# Altium PCB Earphone-4.PcbDoc
Units mm, origin at the board's own origin, x right, y up, seen from the top; angles counter-clockwise.
Board outline 20.1 x 47.1 mm, 2 copper layers (Top Layer, Bottom Layer); 36 components, 27 nets, 152 pads, 27 vias.
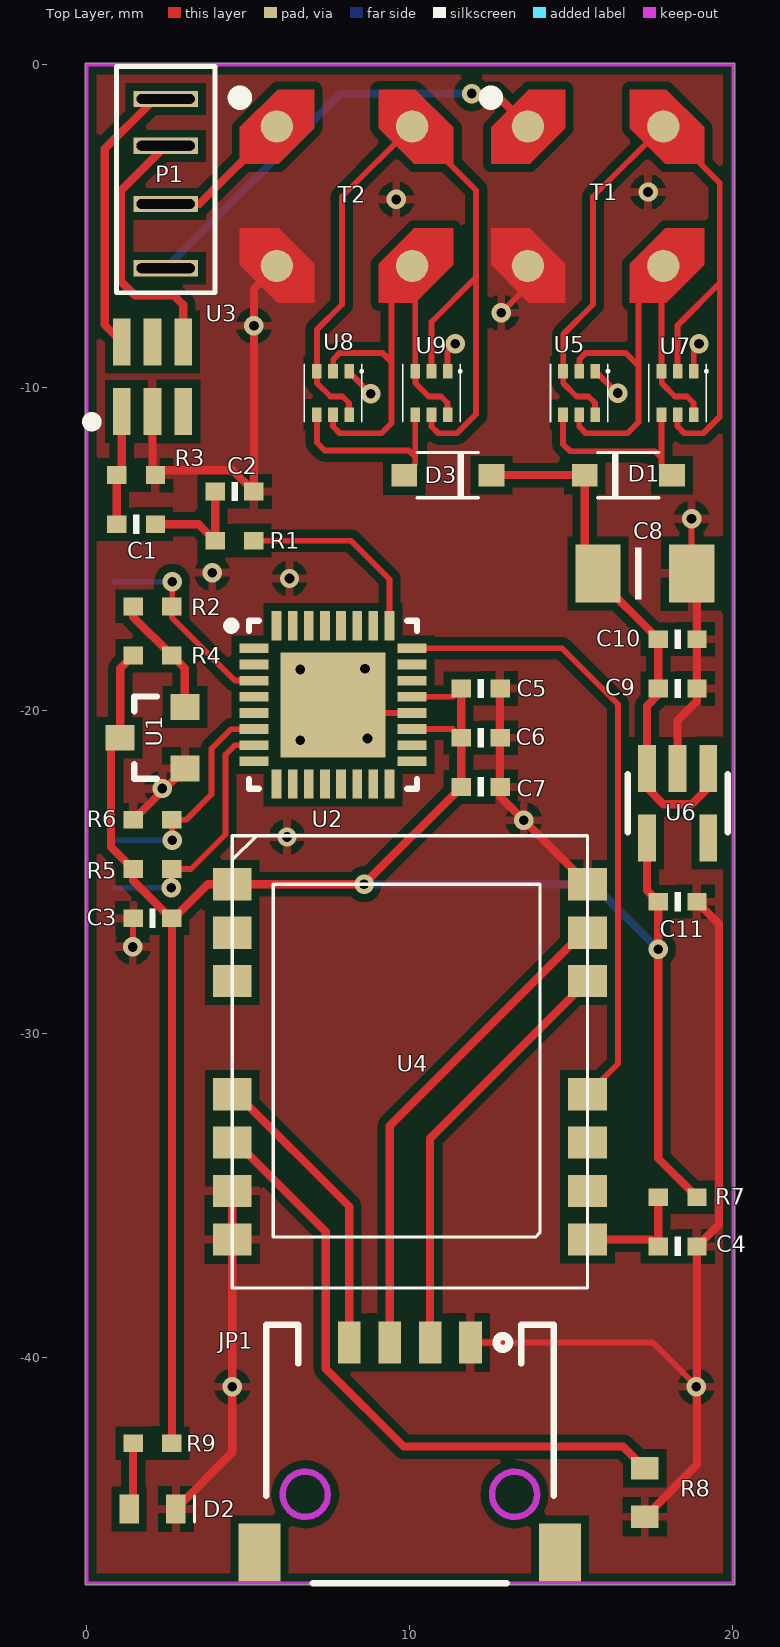
[diagram p0: Top Layer view]
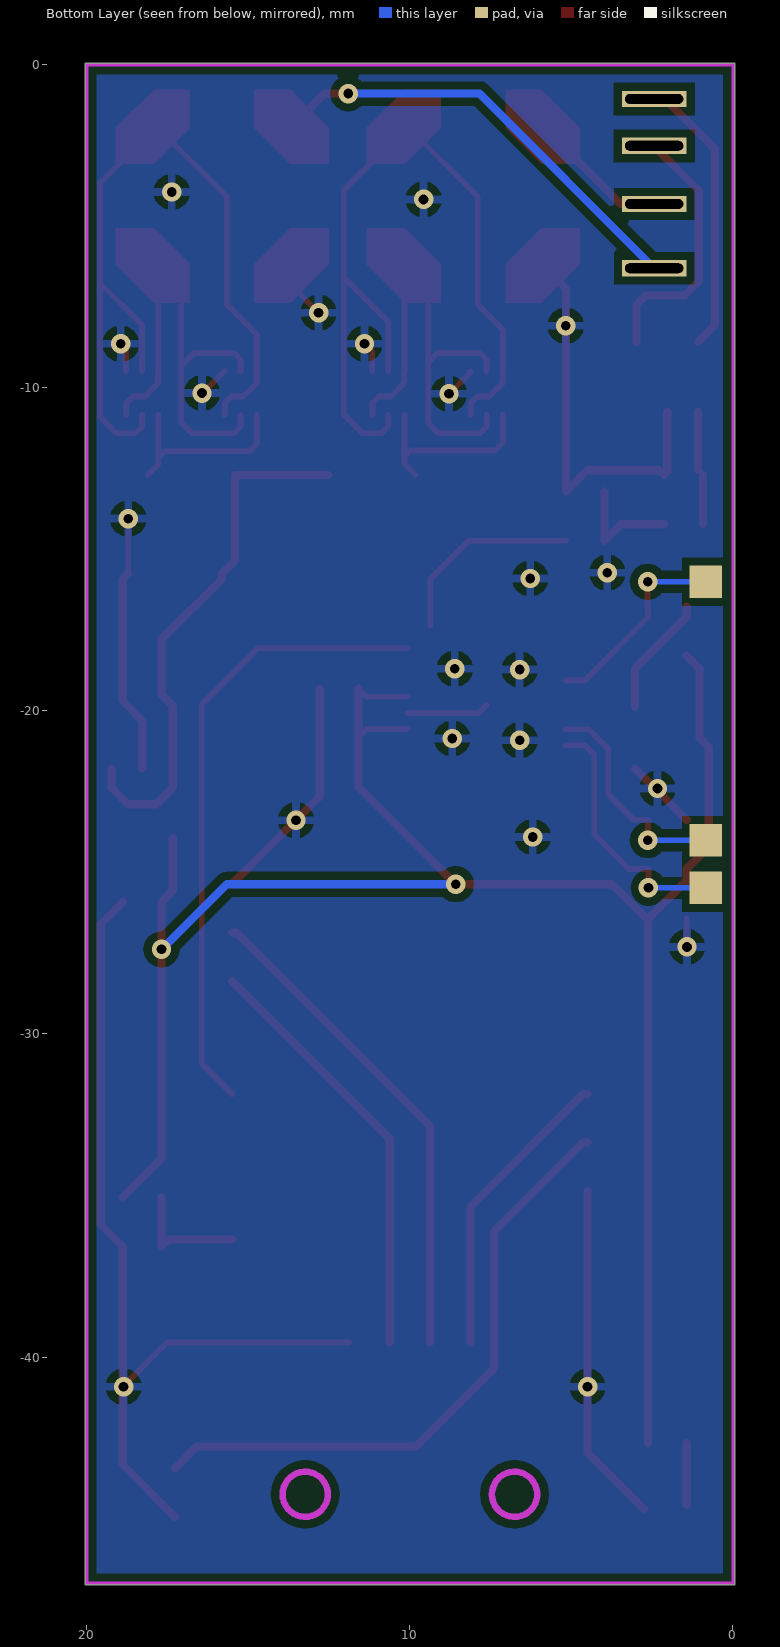
[diagram p1: Bottom Layer view, seen from below]
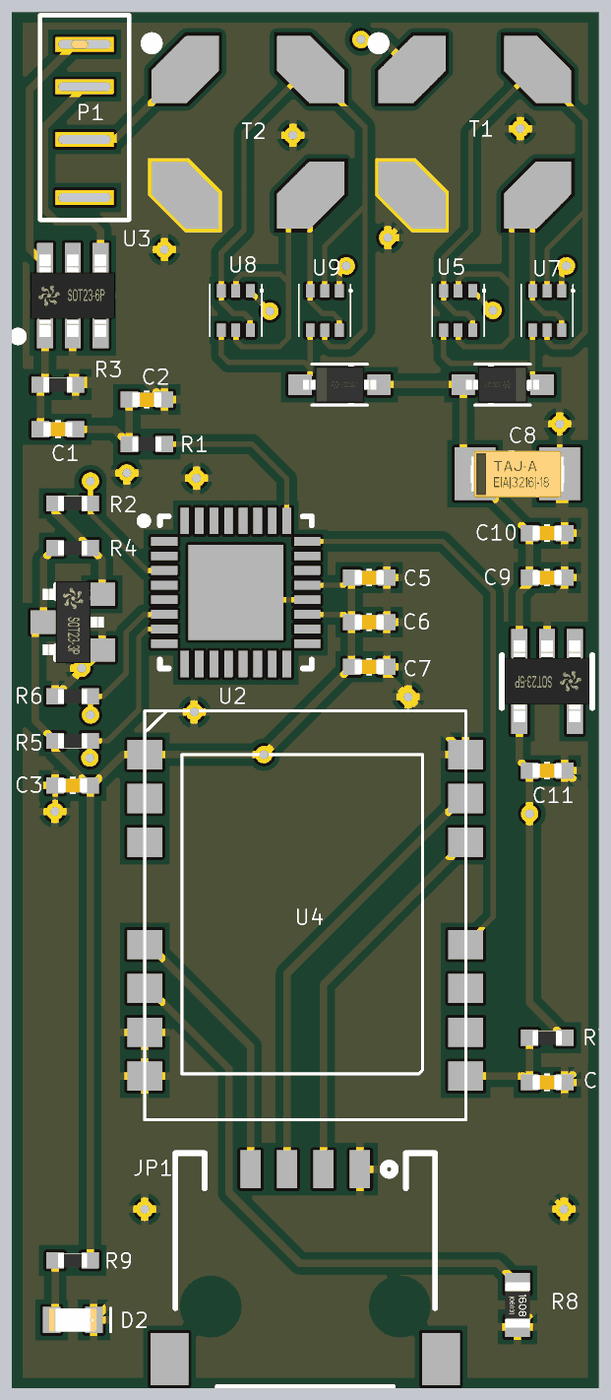
[diagram p2: 3D render of the assembled board from above, using the file's embedded part models]

## Layer stack, top to bottom
Top Layer: signal copper 0.0356
Dielectric: dielectric 0.32, FR-4, Dk 4.8
Bottom Layer: signal copper 0.0356

## Board outline
-0.05,-47.05 20.05,-47.05 20.05,0.05 -0.05,0.05

## Design rules (kind name [scope] priority, off if disabled: settings)
Clearance [All] p1: gap=0.254
HoleSize [All] p1: absolutevalues=TRUE maxlimit=2.54 minlimit=0.1 maxpercent=80.000 minpercent=20.000
HoleToHoleClearance [All] p1: gap=0.2 allowstackedmicrovias=TRUE
MinimumSolderMaskSliver [All] p1: minsoldermaskwidth=0.1
PolygonConnect [All] p1: connectstyle=Relief reliefconductorwidth=0.254 reliefentries=4 polygonreliefangle="90 Angle"
RoutingVias [All] p1: holewidth=0.711 width=1.27 viastyle="Through Hole" minholewidth=0.1 minwidth=0.1 maxholewidth=0.711 maxwidth=1.27
SilkToSilkClearance [All] p1: silktosilkclearance=0.1
SilkscreenOverComponentPads [All] p1: minsilkscreentomaskgap=0.1
SolderMaskExpansion [All] p1: expansion=0.102
TestPointUsage [All] p1: valid=0 allowmultiple=FALSE
Testpoint [All] p1: side=15 testpointundercomponent=TRUE minsize=1.016 maxsize=2.54 preferedsize=1.524 minholesize=0 maxholesize=1.016 preferedholesize=0.813 testpointgrid=0.025 style=1023 order=0-112345678
Width [All] p1: maxlimit=0.254 minlimit=0.1 preferedwidth=0.254 minimp=50.000000 maximp=50.000000 favimp=50.000000
19 further rules are at their usual default settings.

## Components (designator, comment, footprint, x,y, rotation, side; value= is the part's Value field where it differs from the comment)
C1 "2.2uF" 0402C 1.524,-14.224 r0 top
C2 "47pF" 0402C 4.572,-13.208 r180 top
C3 "10uF" 0402C 2.032,-26.416 r180 top
C4 "1uF" 0402C 18.288,-36.576 r180 top
C5 "0.01uF" 0402C 12.192,-19.304 r180 top
C6 "0.01uF" 0402C 12.192,-20.828 r180 top
C7 "0.01uF" 0402C 12.192,-22.352 r180 top
C8 "CP6032-100uF" T3216-18[A] 17.272,-15.748 r0 top
C9 "1uF" 0402C 18.288,-19.304 r180 top
C10 "10uF" 0402C 18.288,-17.78 r180 top
C11 "10uF" 0402C 18.288,-25.908 r180 top
D1 "PMEG4002EJ" SOD323 16.764,-12.7 r0 top
D2 "LED" 0603L 2.032,-44.704 r0 top
D3 "PMEG4002EJ" SOD323 11.176,-12.7 r180 top
JP1 "TEST_PAPER" TEST_PAPER 10,-42.8 r0 top
P1 "EarPhone" EARPHONE 2.44,-3.556 r0 top
R1 "1K" 0402R 4.572,-14.732 r180 top
R2 "10K" 0402R 2.032,-16.764 r180 top
R3 "1K" 0402R 1.524,-12.7 r0 top
R4 "100K" 0402R 2.032,-18.288 r180 top
R5 "10K" 0402R 2.032,-24.892 r0 top
R6 "10K" 0402R 2.032,-23.368 r180 top
R7 "10K" 0402R 18.288,-35.052 r0 top
R8 "NTC" 0603R 17.272,-44.196 r90 top
R9 "10K" 0402R 2.032,-42.672 r180 top
T1 "LPR6235" "TRANS EMI" 15.748,-4.064 r0 top
T2 "LPR6235" "Trans EMI" 7.976,-4.064 r0 top
U1 "MAX809" SOT23 2.032,-20.828 r90 top
U2 "LPC822M101JHI33" QFN50P500X500X100-33N 7.62,-19.812 r0 top
U3 "ASC0201" SOT23-6 2.032,-9.652 r0 top
U4 "RB1402" RB1402 10,-30.862 r0 top
U5 "NTZD3155C" SOT-563 15.24,-10.16 r180 top
U6 "MIC5231" SOT23-5 18.288,-22.86 r180 top
U7 "NTZD3155C" SOT-563 18.288,-10.16 r180 top
U8 "NTZD3155C" SOT-563 7.62,-10.16 r180 top
U9 "NTZD3155C" SOT-563 10.668,-10.16 r180 top

## Footprints (in the part's own frame and the unit in brackets; to place one, negate y for a bottom-side part, rotate by r counter-clockwise, add the part's x,y. Pads: shape width x height; smd on the part's side, far side on the other; paste and mask are expansions set on the pad)
0402C [mm]
  rect 0.6x0.55 smd: 1(-0.6,0) 2(0.6,0)
  silkscreen extent -0.1,-0.3 0.1,0.3, body extent -0.5,-0.25 0.5,0.25, height 0.5
0402R [mm]
  rect 0.6x0.55 smd: 1(-0.6,0) 2(0.6,0)
  body extent -0.5,-0.25 0.5,0.25, height 0.35
0603L [mm]
  rect 0.6x0.9 smd: 1(-0.725,0) 2(0.725,0)
  silkscreen extent 1.3,-0.4 1.3,0.4, body extent -0.8,-0.41 0.8,0.39, height 0.6
0603R [mm]
  rect 0.7x0.85 smd: 1(-0.75,0) 2(0.75,0)
  body extent -0.77,-0.43 0.77,0.43, height 0.46
EARPHONE [mm]
  rect 2x0.5 hole 0.3 slot 1.8 at 0 deg: 1(0,-2.74) 2(0,-0.75) 3(0,1.05) 4(0,2.5)
  silkscreen extent -1.52,-3.5 1.52,3.5
QFN50P500X500X100-33N [mm]
  rect 0.9x0.3 smd: 1(-2.45,1.75) 2(-2.45,1.25) 3(-2.45,0.75) 4(-2.45,0.25) 5(-2.45,-0.25) 6(-2.45,-0.75) 7(-2.45,-1.25) 8(-2.45,-1.75) 17(2.45,-1.75) 18(2.45,-1.25) 19(2.45,-0.75) 20(2.45,-0.25) 21(2.45,0.25) 22(2.45,0.75) 23(2.45,1.25) 24(2.45,1.75)
  rect 0.3x0.9 smd: 9(-1.75,-2.45) 10(-1.25,-2.45) 11(-0.75,-2.45) 12(-0.25,-2.45) 13(0.25,-2.45) 14(0.75,-2.45) 15(1.25,-2.45) 16(1.75,-2.45) 25(1.75,2.45) 26(1.25,2.45) 27(0.75,2.45) 28(0.25,2.45) 29(-0.25,2.45) 30(-0.75,2.45) 31(-1.25,2.45) 32(-1.75,2.45)
  rect 3.25x3.25 smd: 33(0,0)
  silkscreen extent -3.27,-2.6 2.6,2.6
RB1402 [mm]
  rect 1.2x1 smd: 1(-5.5,5.5) 2(-5.5,4) 3(-5.5,2.5) 4(-5.5,-1) 5(-5.5,-2.5) 6(-5.5,-4) 7(-5.5,-5.5) 8(5.5,-5.5) 9(5.5,-4) 10(5.5,-2.5) 11(5.5,-1) 12(5.5,2.5) 13(5.5,4) 14(5.5,5.5)
  silkscreen extent -5.5,-7 5.5,7
SOD323 [mm]
  rect 0.8x0.7 smd: 1(-1.35,0) 2(1.35,0)
  silkscreen extent -0.95,-0.7 0.95,0.7, body extent -1.26,-0.63 1.24,0.63, height 1.1
SOT23 [mm]
  rect 0.8x0.9 smd: 1(-0.95,-1) 2(0.95,-1) 3(0,1)
  silkscreen extent -1.28,-0.13 1.28,0.57, body extent -1.4,-1.07 1.4,1.03, height 0.9
SOT23-5 [mm]
  rect 0.55x1.45 smd: 1(-0.95,-1.075) 2(0,-1.075) 3(0.95,-1.075) 4(0.95,1.075) 5(-0.95,1.075)
  silkscreen extent -1.55,-0.9 1.55,0.9, body extent -1.45,-1.42 1.45,1.4, height 1.1
SOT23-6 [mm]
  rect 0.55x1.45 smd: 1(-0.95,-1.075) 2(0,-1.075) 3(0.95,-1.075) 4(0.95,1.075) 5(0,1.075) 6(-0.95,1.075)
  silkscreen extent -1.98,-1.5 -1.78,-1.3, body extent -1.45,-1.41 1.45,1.41, height 1.05
SOT-563 [mm]
  rect 0.3x0.45 smd: 1(-0.5,-0.675) 2(0,-0.675) 3(0.5,-0.675) 4(0.5,0.675) 5(0,0.675) 6(-0.5,0.675)
  silkscreen extent -0.94,-0.89 0.89,0.89
T3216-18[A] [mm]
  rect 1.4x1.8 smd: 1(-1.45,0) 2(1.45,0)
  silkscreen extent -0.3,-0.8 -0.1,0.8, body extent -1.6,-0.81 1.6,0.79, height 1.62
TEST_PAPER [mm]
  rect 1.3x1.8 smd: 0(-4.65,-3.25) 0(4.65,-3.25)
  rect 0.7x1.3 smd: 1(1.875,3.25) 2(0.625,3.25) 3(-0.625,3.25) 4(-1.875,3.25)
  Keep-Out Layer circle w0.2: c-3.24,-1.45 r0.7
  Keep-Out Layer circle w0.2: c3.24,-1.45 r0.7
  silkscreen extent -4.45,-4.2 4.45,3.8
"TRANS EMI" [mm]
  round 1 smd: 1(-2.095,2.159) 2(-2.095,-2.159) 3(2.095,-2.159) 4(2.095,2.159)
  Top Layer region: -3.237,1 -3.237,2.125 -2.061,3.3 -0.937,3.3 -0.937,2.1 -2.037,1
  Top Layer region: -3.237,-2.125 -2.061,-3.3 -0.937,-3.3 -0.937,-2.1 -2.037,-1 -3.237,-1
  Top Layer region: 1.064,-3.3 1.064,-2.1 2.164,-1 3.364,-1 3.364,-2.125 2.188,-3.3
  Top Layer region: 1.064,2.1 2.164,1 3.364,1 3.364,2.125 2.188,3.3 1.064,3.3
  silkscreen extent -3.37,2.92 -3.11,3.17
"Trans EMI" [mm]
  round 1 smd: 1(-2.095,2.159) 2(-2.095,-2.159) 3(2.095,-2.159) 4(2.095,2.159)
  Top Layer region: -3.237,1 -3.237,2.125 -2.061,3.3 -0.937,3.3 -0.937,2.1 -2.037,1
  Top Layer region: -3.237,-2.125 -2.061,-3.3 -0.937,-3.3 -0.937,-2.1 -2.037,-1 -3.237,-1
  Top Layer region: 1.064,-3.3 1.064,-2.1 2.164,-1 3.364,-1 3.364,-2.125 2.188,-3.3
  Top Layer region: 1.064,2.1 2.164,1 3.364,1 3.364,2.125 2.188,3.3 1.064,3.3
  silkscreen extent -3.37,2.92 -3.11,3.17

## Part data
C1 C2 C3 C4 C5 C6 C7 C9 C10 C11: library part CAP
C8: library part "CAP POL2"
D1 D3: "SOD323F"
R1 R2 R3 R4 R5 R6 R7 R8 R9: library part RES
T1 T2: library part "Trans EMI"
U1 U4: "SOT23"
U2 U3: "SOT23-6"

## Free pads (board coordinates)
  rect 1x1 smd far side: 1(0.838,-16.002) 2(0.838,-25.476) 3(0.838,-24.003)

## Via types
v1: diameter 0.6, hole 0.3, Top Layer to Bottom Layer, 27 vias

## Nets (pads, with @x,y where several pads share a name; then routed paths per layer and width w, separated by ;. In a path a pad name is that pad's centre, name@x,y a point inside that pad or via, vN(x,y) a via of type N, cw(c..) or ccw(c..) an arc to the next point about the centre after c; other vN are vias at no path point)
AINO: JP1.4 U4.4 | length 9.3
  Top Layer w0.254: U4.4 4.639,-31.862 8.125,-35.348 JP1.4
G/M: P1.4 U3.6 | length 8.7
  Top Layer w0.254: U3.6 0.551,-8.046 0.551,-2.606 2.101,-1.056 P1.4
GND: C2.1 C3.2 C4.1 C5.1 C6.1 C7.1 C8.2 C9.1 C10.1 C11.1 D2.2 JP1.1 R3.2 R6.2 R8.1 T1.2 T2.2 U1.1 U2.20 U2.33 U3.2 U4.6 U4.7 U4.14 U5.1 U6.2 U7.1 U8.1 U9.1 | length 77.2
  Top Layer w0.18: v1@1.432,-27.295 C3.2 ; U2.33 7.87,-20.062 U2.20 ; U8.1 8.12,-9.517 v1(8.788,-10.185) ; U9.1 11.168,-8.873 v1(11.405,-8.636) ; JP1.1 17.519,-39.55 v1@18.888,-40.919 ; v1(12.827,-7.671) 13.652,-6.845 T1.2 ; U5.1 v1@16.415,-10.16 ; C8.2@18.72,-15.746 v1(18.72,-14.046) ; U7.1 v1@18.788,-8.796
  Top Layer w0.254: R6.2 1.442,-23.368 U1.1 ; R3.2@2.032,-12.608 U3.2 ; R3.2 2.272,-12.552 4.516,-12.552 C2.1 5.172,-6.931 T2.2 ; D2.2 4.5,-42.961 U4.7 U4.6 ; C5.1 C6.1 C7.1 12.792,-22.654 U4.14 ; R8.1 18.888,-43.33 18.888,-40.919 C4.1 19.569,-35.895 19.569,-26.589 C11.1 ; U6.2 18.288,-20.295 18.888,-19.695 C9.1 C10.1 18.888,-15.914 C8.2
  other v1: 4.5,-40.919 18.863,-40.919 1.422,-27.305 6.198,-23.901 13.525,-23.387 2.337,-22.403 6.604,-20.904 8.687,-20.853 6.604,-18.72 8.611,-18.694 6.274,-15.9 3.886,-15.723 16.434,-10.16 18.948,-8.636 5.172,-8.077 9.576,-4.166 17.374,-3.937
L-CH: P1.1 T1.1 | length 13.9
  Top Layer w0.254: v1(11.913,-0.889) 12.636,-0.889 T1.1
  Bottom Layer w0.254: P1.1 7.847,-0.889 v1(11.913,-0.889)
M/G: P1.3 U3.4 | length 8.1
  Top Layer w0.254: P1.3 1.059,-3.887 1.059,-6.704 1.493,-7.137 2.692,-7.137 2.982,-7.427 U3.4
MIC: C1.1 R3.1 U3.1 | length 3.3
  Top Layer w0.254: C1.1 R3.1 ; R3.1@1.082,-12.542 U3.1
NetC1_2: C1.2 C2.2 R1.2 | length 3.6
  Top Layer w0.254: C1.2 3.464,-14.224 R1.2 C2.2
NetC4_2: C4.2 R7.1 U4.8 | length 3.8
  Top Layer w0.254: U4.8 17.474,-36.362 C4.2 R7.1
NetD1_2: D1.2 U5.4 U7.4 | length 6.1
  Top Layer w0.18: U5.4 14.74,-11.743 14.961,-11.963 17.585,-11.963 17.788,-12.167 ; U7.4 17.788,-12.167 ; D1.2 17.788,-12.374 17.788,-12.167
NetD2_1: D2.1 R9.2 | length 1.9
  Top Layer w0.254: D2.1@1.432,-44.579 R9.2
NetD3_2: D3.2 U8.4 U9.4 | length 6.1
  Top Layer w0.18: U8.4 7.12,-11.692 7.366,-11.938 9.965,-11.938 10.168,-12.141 ; D3.2 10.168,-12.358 10.168,-12.141 ; U9.4 10.168,-12.141
NetR2_2: R2.2 R4.1 U1.2 | length 3.8
  Top Layer w0.254: R2.2 1.432,-17.088 R4.1 3.032,-18.688 U1.2
NetT1_3: T1.3 U5.2 U5.5 U7.3 U7.6 | length 15.2
  Top Layer w0.18: U5.5 15.24,-11.196 15.448,-11.404 16.739,-11.404 17.078,-11.065 17.078,-9.322 ; U5.2 15.246,-9.479 15.246,-9.118 15.448,-8.916 16.672,-8.916 17.078,-9.322 ; T1.3 T1.3@17.788,-6.278 ; U7.6 18.782,-10.829 18.782,-10.468 18.58,-10.266 18.208,-10.266 17.794,-9.852 17.794,-9.491 U7.3 T1.3@17.788,-6.278 ; 17.078,-9.322 17.078,-6.989 T1.3@17.788,-6.278
NetT1_4: T1.4 U5.3 U5.6 U7.2 U7.5 | length 25.8
  Top Layer w0.18: U5.6 15.734,-10.829 15.734,-10.468 15.532,-10.266 15.16,-10.266 14.746,-9.852 14.746,-9.491 U5.3 14.746,-9.479 14.746,-8.343 15.672,-7.417 15.672,-4.077 T1.4 19.592,-3.654 19.592,-6.756 ; U7.5 18.288,-11.196 18.496,-11.404 19.08,-11.404 19.592,-10.892 19.592,-6.756 ; U7.2 18.288,-8.061 19.592,-6.756
NetT2_3: T2.3 U8.2 U8.5 U9.3 U9.6 | length 15
  Top Layer w0.18: U8.5 7.62,-11.196 7.828,-11.404 9.119,-11.404 9.432,-11.091 9.432,-9.204 ; U8.2 7.626,-9.479 7.626,-9.118 7.828,-8.916 9.145,-8.916 9.432,-9.204 ; T2.3 9.432,-6.862 9.432,-9.204 ; T2.3@10.168,-6.32 U9.3 10.174,-9.491 10.174,-9.852 10.588,-10.266 10.96,-10.266 11.162,-10.468 11.162,-10.829 U9.6
NetT2_4: T2.4 U8.3 U8.6 U9.2 U9.5 | length 26.1
  Top Layer w0.18: U8.6 8.114,-10.829 8.114,-10.468 7.912,-10.266 7.54,-10.266 7.126,-9.852 7.126,-9.491 U8.3 7.12,-8.196 7.899,-7.417 7.899,-4.077 T2.4 12.049,-3.882 12.049,-6.579 ; U9.5 10.668,-11.196 10.876,-11.404 11.46,-11.404 12.049,-10.816 12.049,-6.579 ; U9.2 10.668,-7.959 12.049,-6.579
NTC: R8.2 U4.5 | length 19.4
  Top Layer w0.254: U4.5 4.639,-33.362 7.394,-36.117 7.394,-40.358 9.81,-42.774 16.6,-42.774 R8.2
P02: pad.2 R5.2 U2.7 | length 7.9
  Top Layer w0.18: v1(2.616,-25.476) 2.616,-24.908 R5.2 3.226,-24.892 4.293,-23.825 4.293,-21.353 4.584,-21.062 U2.7
  Bottom Layer w0.18: pad.2 v1(2.616,-25.476)
P03: pad.3 R6.1 U2.6 | length 7
  Top Layer w0.18: v1@2.632,-23.993 R6.1 3.073,-23.368 3.859,-22.583 3.859,-21.173 4.464,-20.568 5.164,-20.568 U2.6
  Bottom Layer w0.18: pad.3 v1(2.642,-24.003)
P05: pad.1 R2.1 U2.3 | length 6.2
  Top Layer w0.18: R2.1 2.632,-17.11 4.584,-19.062 U2.3 ; R2.1@2.642,-16.754 v1(2.642,-16.002)
  Bottom Layer w0.18: pad.1 v1(2.642,-16.002)
P14: R1.1 U2.25 | length 6.1
  Top Layer w0.18: R1.1 8.179,-14.732 9.37,-15.923 U2.25
PT15: JP1.2 U4.12 | length 13.2
  Top Layer w0.254: JP1.2 10.625,-33.237 U4.12
PT16: JP1.3 U4.13 | length 15.3
  Top Layer w0.254: JP1.3 9.375,-32.848 15.361,-26.862 U4.13
R-CH: P1.2 T2.1 | length 4.4
  Top Layer w0.254: P1.2 3.479,-4.306 T2.1
RXD: U2.24 U4.11 | length 19.5
  Top Layer w0.18: U2.24 14.709,-18.062 16.444,-19.797 16.444,-30.918 U4.11
VCC: C3.1 C5.2 C6.2 C7.2 C11.2 R4.2 R5.1 R7.2 R9.1 U1.3 U2.19 U2.21 U4.1 U6.4 | length 64.1
  Top Layer w0.18: U2.19 11.326,-20.562 C6.2 ; U2.21 11.334,-19.562 C5.2
  Top Layer w0.254: R4.2 1.032,-18.688 U1.3 0.751,-21.109 0.751,-24.211 R5.1 1.432,-25.255 2.593,-26.416 C3.1 ; R9.1 C3.1 ; C5.2 C6.2 C7.2 v1(8.582,-25.362) U4.1 3.746,-25.362 2.692,-26.416 C3.1 ; U6.4 17.338,-25.558 C11.2 17.688,-27.635 17.688,-33.852 R7.2
  Bottom Layer w0.254: v1(8.582,-25.362) 15.659,-25.362 v1@17.688,-27.391
  other v1: 17.688,-27.381
VCCIN: C8.1 C9.2 C10.2 D1.1 D3.1 U6.1 U6.3 | length 16.6
  Top Layer w0.254: D3.1 D1.1 15.414,-15.34 C8.1 15.822,-15.914 C10.2 17.688,-19.498 17.338,-19.848 17.338,-22.374 17.855,-22.891 18.721,-22.891 19.238,-22.374 U6.1
pads on no net: JP1.0 U2.1 U2.2 U2.4 U2.5 U2.8 U2.9 U2.10 U2.11 U2.12 U2.13 U2.14 U2.15 U2.16 U2.17 U2.18 U2.22 U2.23 U2.26 U2.27 U2.28 U2.29 U2.30 U2.31 U2.32 U3.3 U3.5 U4.2 U4.3 U4.9 U4.10 U6.5

## Polygon pours and split planes (outlines as drawn)
GND on Top Layer "Top Layer-No Net" (solid, remove dead copper): 0,0 20,0 20,-47 0,-47
GND on Bottom Layer "Top Layer-No Net" (solid, remove dead copper): 0,0 20,0 20,-47 0,-47

## Keep-outs
Keep-Out Layer:
  lines w0.1: 0,-47 0,0 20,0 20,-47 0,-47

## Text inside footprints (layer, text, board x,y; h text height)
C8: Mechanical 15 "+" at 15.875,-16.256 h0.51; Mechanical 15 "-" at 18.161,-16.129 h0.51
U2: Mechanical 15 "1" at 7.456,-20.262 h0.51